# EAGLE board PropVGA (EAGLE 6.4)
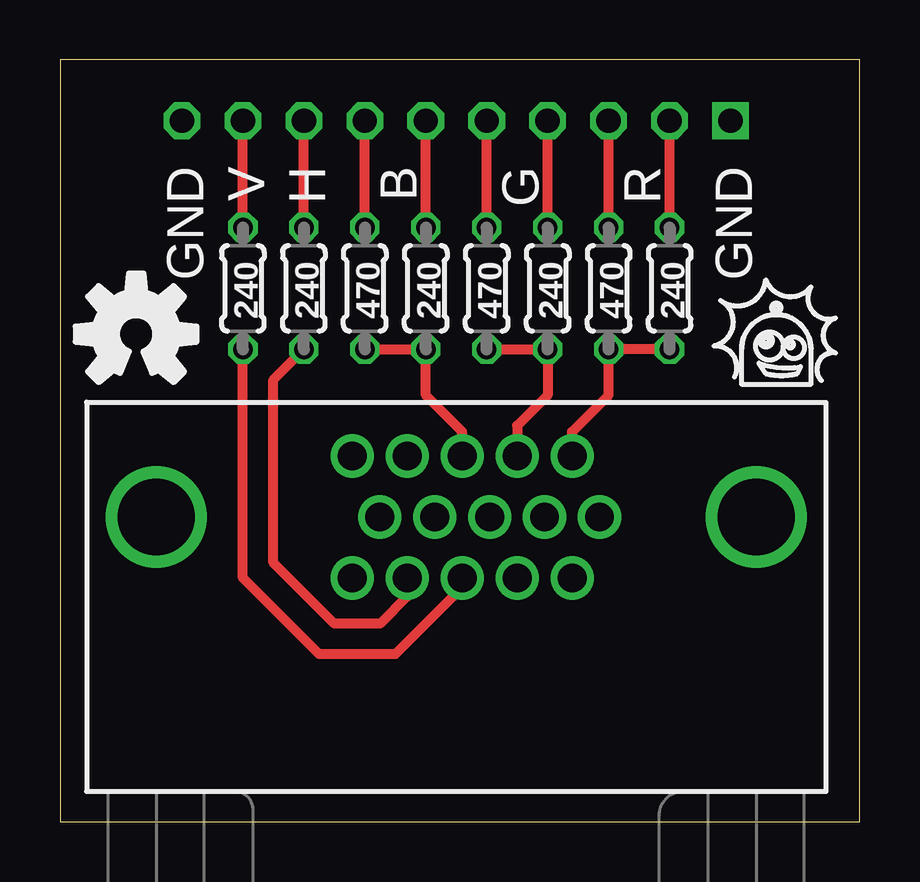
[diagram p0: board, top side]
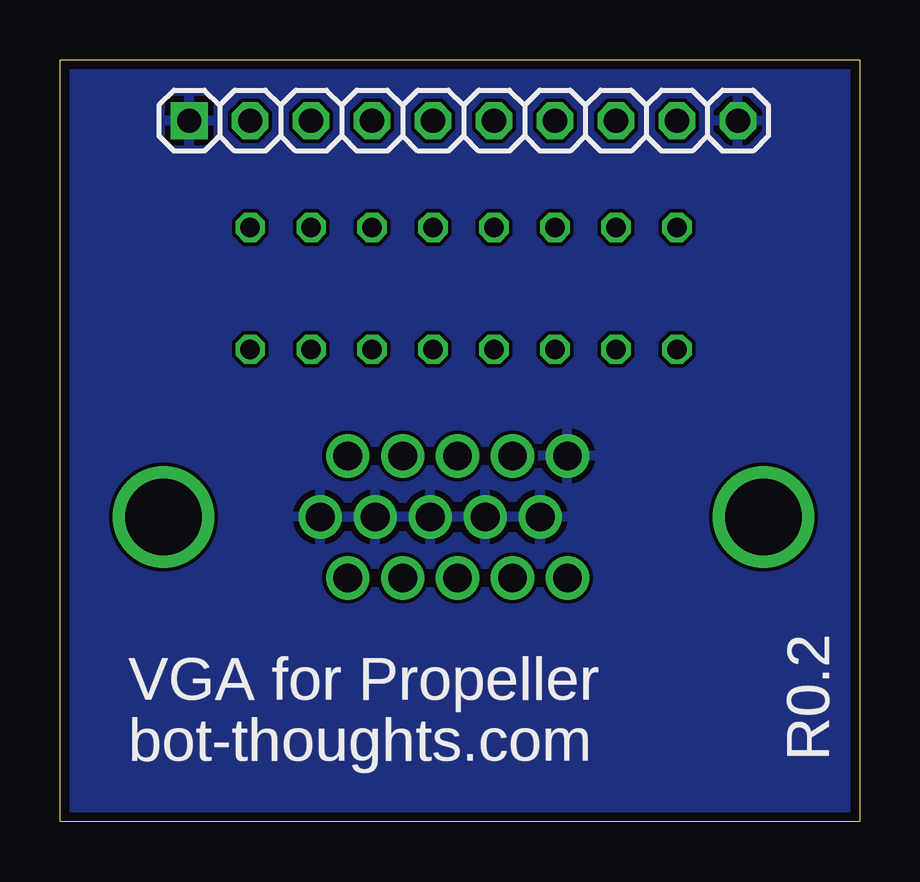
[diagram p1: board, bottom side, seen from below]

Size 33.33 x 31.74 mm. Coordinates in mm from the lower left corner, seen from the top.
Outline: 0,0 33.33,0 33.33,31.74 0,31.74 0,0
Copper layers (1*16): Top 0.0356mm / dielectric 1.5011mm / Bottom 0.0356mm
Design rules "LaenPCBOrder": minimum track width 6mil, minimum drill 13mil, track to track 6mil, track to pad 6mil, pad to pad 6mil, via to via 6mil, smd to smd 6mil, copper to edge 15mil, drill to drill 6mil, minimum pad ring 7mil, minimum via ring 7mil, stop-mask expansion 4mil, vias tented up to drill 0mil, thermal gap 10mil

## Footprints (pad centres in the part's own frame; a part is rotated, then mirrored left to right if it is on the bottom)
FCI_DSUB_HD_15_RA = drill 1.2: P1 4.83,2.54; P2 2.54,2.54; P3 0.25,2.54; P4 -2.04,2.54; P5 -4.33,2.54; P6 5.97,0; P7 3.68,0; P8 1.39,0; P9 -0.9,0; P10 -3.19,0; P11 4.83,-2.54; P12 2.54,-2.54; P13 0.25,-2.54; P14 -2.04,-2.54; P15 -4.33,-2.54 | drill 3.2: P$13 -12.5,0; P$14 12.5,0
1X10-S = drill 1.016 square: 1 -11.43,0 | drill 1.016 octagon: 2 -8.89,0; 3 -6.35,0; 4 -3.81,0; 5 -1.27,0; 6 1.27,0; 7 3.81,0; 8 6.35,0; 9 8.89,0; 10 11.43,0
0204/5 = drill 0.813 octagon: 1 -2.54,0; 2 2.54,0

## Placement (x,y rotation side)
JP2  VGA  [FCI_DSUB_HD_15_RA]  16.51,12.7 0 top
JP3  [1X10-S]  16.51,29.21 0 bottom
R1  240  [0204/5]  7.62,22.23 90 top
R2  240  [0204/5]  10.16,22.23 90 top
R3  470  [0204/5]  12.7,22.23 90 top
R4  240  [0204/5]  15.24,22.23 90 top
R5  470  [0204/5]  17.78,22.23 90 top
R6  240  [0204/5]  20.32,22.23 90 top
R7  470  [0204/5]  22.86,22.23 90 top
R8  240  [0204/5]  25.4,22.23 90 top

## Library data of the parts
JP2 = mes_electromech
JP3 = pinhead-2
R1-R8 = rcl

## Nets
B: JP2.P3 R3.1 R4.1
G: JP2.P2 R5.1 R6.1
GND: JP2.P5 JP2.P6 JP2.P7 JP2.P8 JP2.P9 JP2.P10 JP3.1 JP3.10
H: JP2.P14 R2.1
N$12: JP3.9 R1.2
N$13: JP3.8 R2.2
N$14: JP3.7 R3.2
N$15: JP3.6 R4.2
N$16: JP3.5 R5.2
N$17: JP3.4 R6.2
N$18: JP3.3 R7.2
N$19: JP3.2 R8.2
R: JP2.P1 R7.1 R8.1
V: JP2.P13 R1.1

## Tracks (layer width: path | path; a pad name or v marks a point on that pad's centre or on a via)
B
  Top 0.406: R3.1 R4.1 15.24,17.78 16.76,16.26 JP2.P3
G
  Top 0.406: R5.1 R6.1 20.32,17.78 19.05,16.51 JP2.P2
GND
  pour Bottom: 0,0 33.02,0 33.02,31.75 0,31.75
H
  Top 0.406: JP2.P14 14.47,9.39 13.34,8.26 11.43,8.26 8.89,10.79 8.89,18.41 R2.1
N$12
  Top 0.406: R1.2 JP3.9
N$13
  Top 0.406: R2.2 JP3.8
N$14
  Top 0.406: R3.2 JP3.7
N$15
  Top 0.406: R4.2 JP3.6
N$16
  Top 0.406: R5.2 JP3.5
N$17
  Top 0.406: R6.2 JP3.4
N$18
  Top 0.406: R7.2 JP3.3
N$19
  Top 0.406: R8.2 JP3.2
R
  Top 0.406: R8.1 R7.1 22.86,17.78 21.34,16.26 JP2.P1
V
  Top 0.406: JP2.P13 16.76,9.78 13.97,6.99 10.79,6.99 7.62,10.16 R1.1

## Text on the board
tNames: GND | V | H | B | G | R | GND
bNames: VGA for Propeller | R0.2 | bot-thoughts.com
tsilk: GND | V | H | B | G | R | GND | 240 | 240 | 470 | 240 | 470 | 240 | 470 | 240
bsilk: VGA for Propeller | R0.2 | bot-thoughts.com